# Altium PCB main.PcbDoc
Units mm, origin at the board's own origin, x right, y up, seen from the top; angles counter-clockwise.
Board outline 68 x 61 mm, 2 copper layers (Top Layer, Bottom Layer); 12 components, 13 nets, 38 pads, 0 vias.
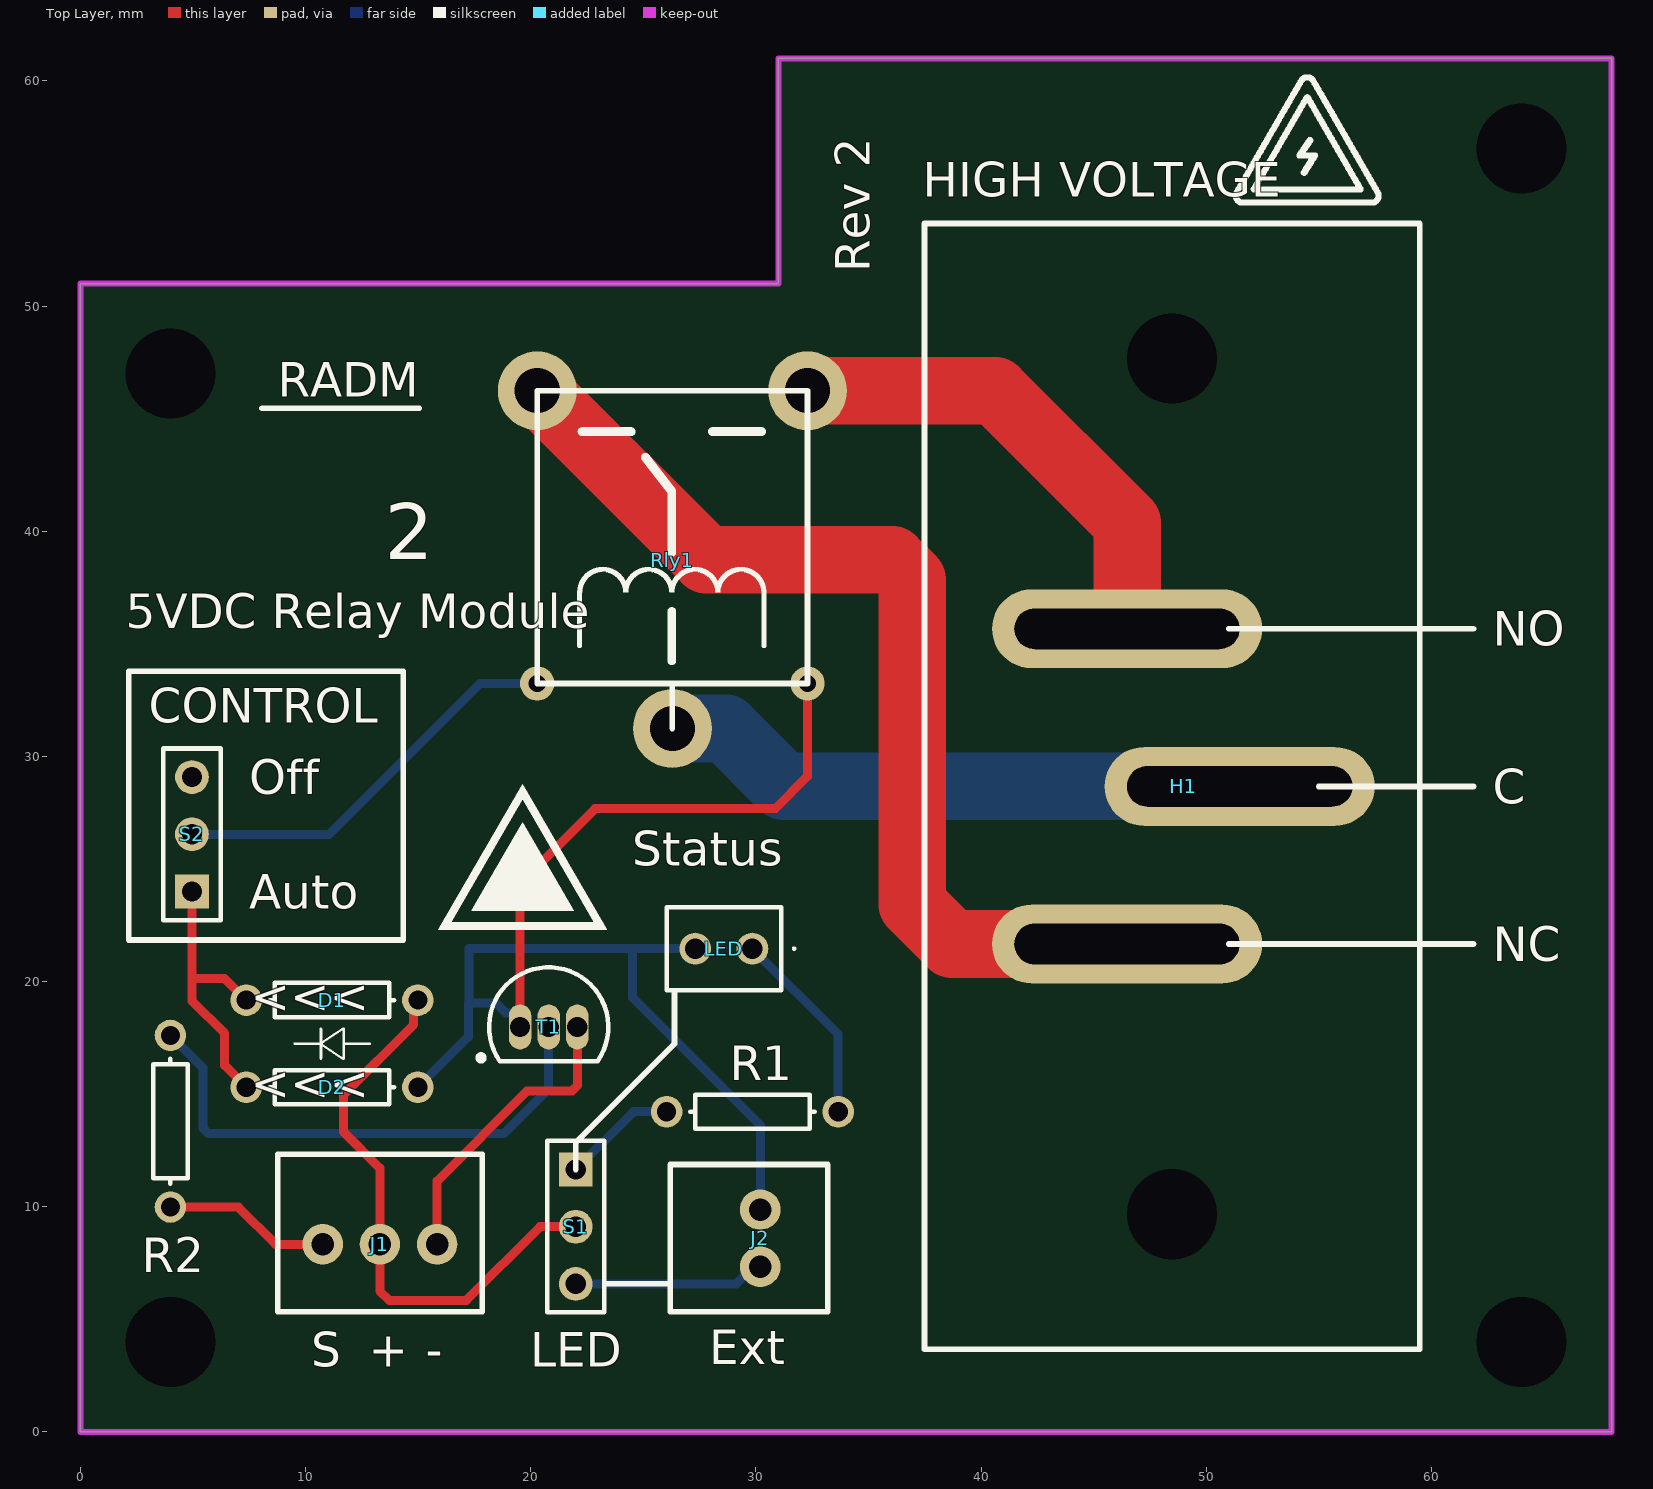
[diagram p0: Top Layer view]
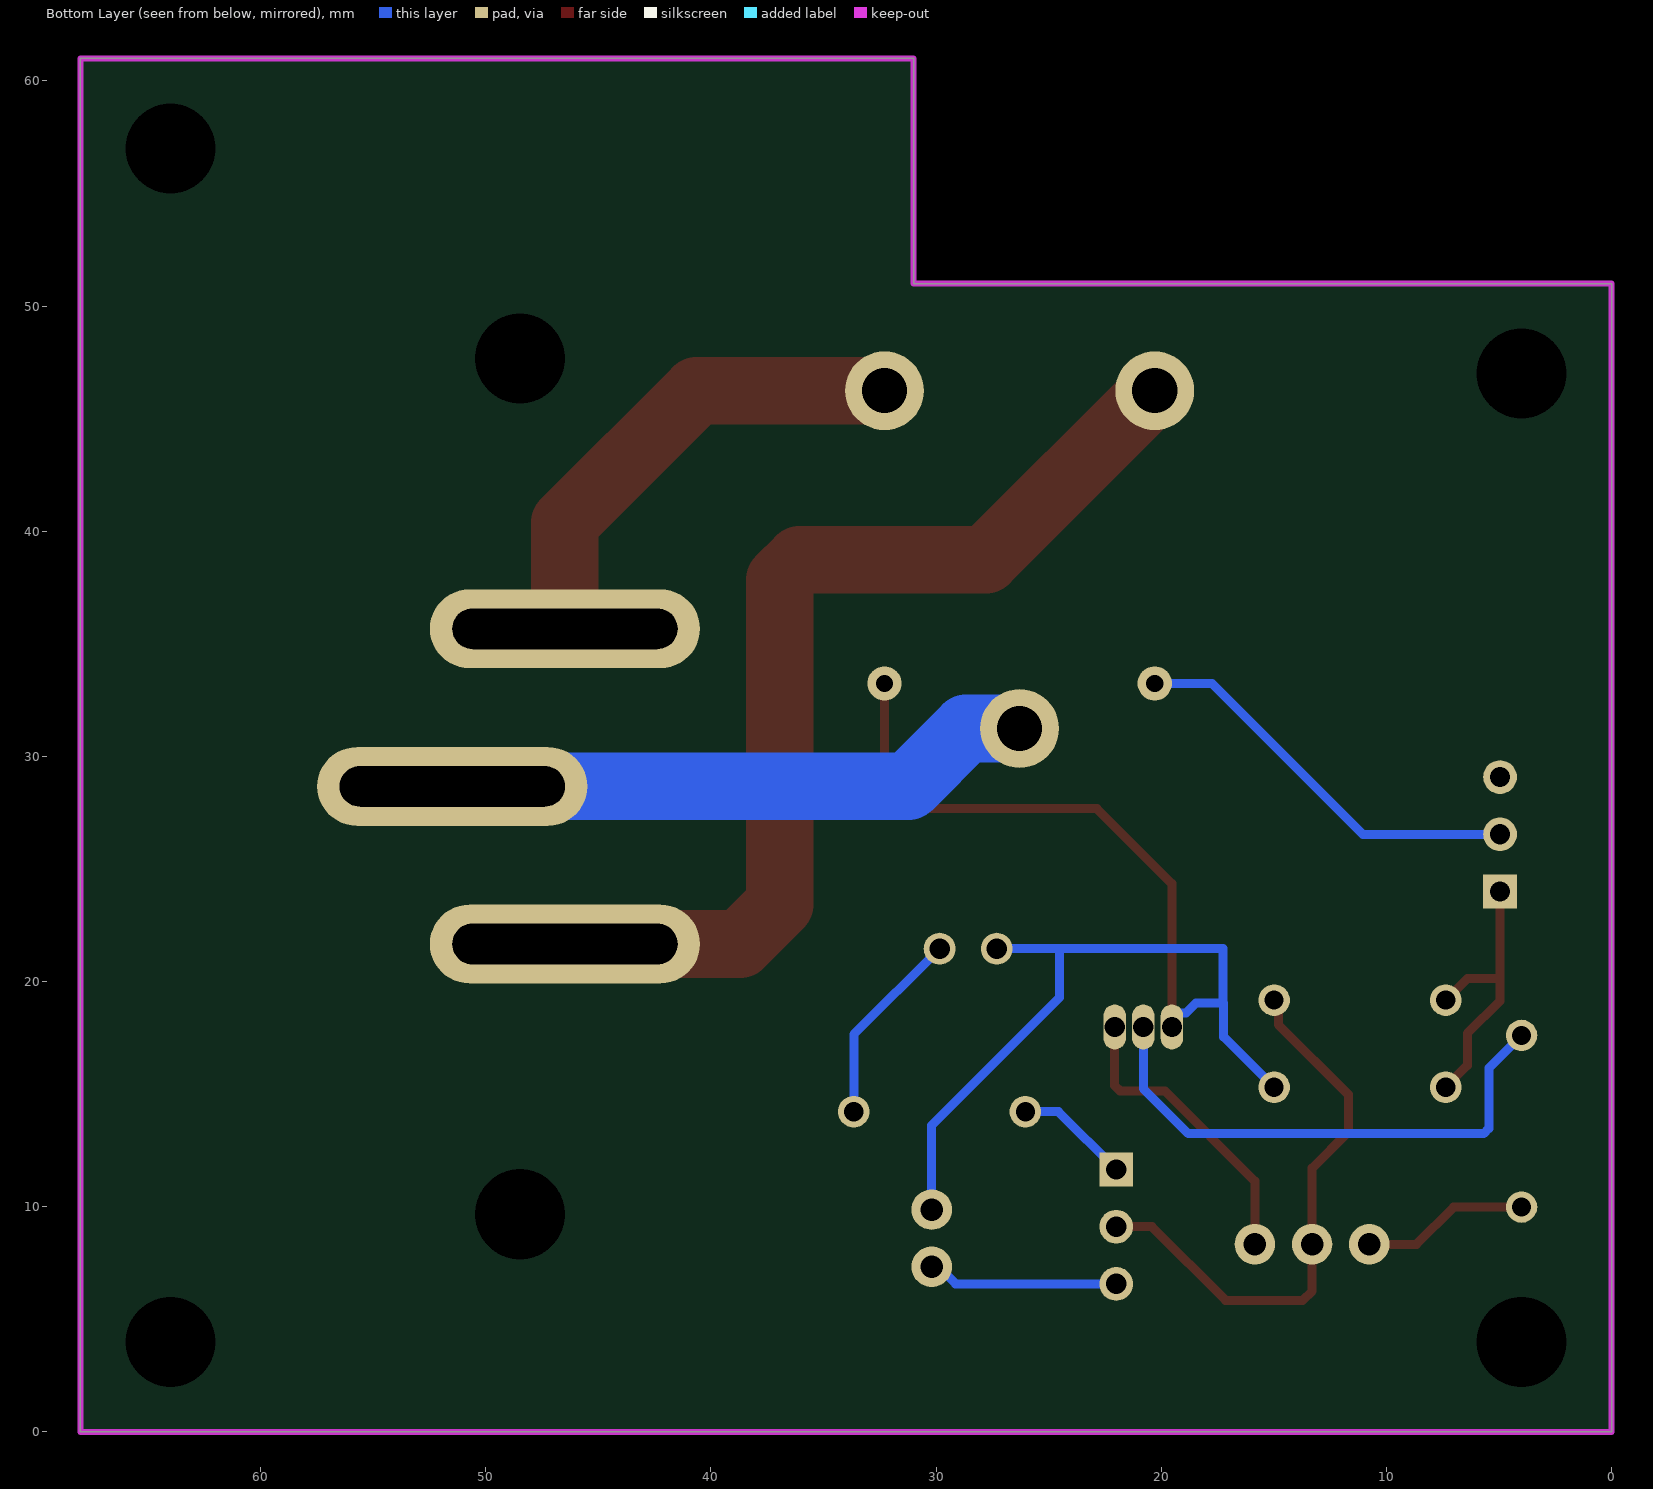
[diagram p1: Bottom Layer view, seen from below]

## Layer stack, top to bottom
Top Solder: solder mask 0.0102, Solder Resist, Dk 3.5
Top Layer: signal copper 0.0356
Dielectric 1: dielectric 0.32, FR-4, Dk 4.8
Bottom Layer: signal copper 0.0356
Bottom Solder: solder mask 0.0102, Solder Resist, Dk 3.5

## Board outline
0,0 68,0 68,61 31,61 31,51 0,51

## Design rules (kind name [scope] priority, off if disabled: settings)
Clearance [All] p1: gap=0.254 ignorepadtopadclearanceinfootprint=FALSE except(0: Arc-Hole Track-Hole SMDPad-Hole THPad-Hole Via-Hole Fill-Hole Poly-Hole Region-Hole Text-Hole)
Height [All] p1: minheight=0 maxheight=40 prefheight=12.7
PolygonConnect [All] p1: connectstyle=Relief reliefconductorwidth=0.254 reliefentries=4 polygonreliefangle="90 Angle" airgapwidth=0.254
RoutingVias [All] p1: holewidth=0.711 width=1.27 viastyle="Through Hole" minholewidth=0.711 minwidth=1.27 maxholewidth=0.711 maxwidth=1.27
SolderMaskExpansion [All] p1: expansion=0.102 istentingtop=FALSE
Width [All] p1: maxlimit=3 minlimit=0.4 preferedwidth=0.4
29 further rules are at their usual default settings.

## Components (designator, comment, footprint, x,y, rotation, side; value= is the part's Value field where it differs from the comment)
D1 "Diode" AXIAL-0.3 11.176,19.177 r0 top value=0
D2 "Diode" AXIAL-0.3 11.176,15.312 r180 top value=0
H1 "1 Pin HV Connector" "C13 Female Plug" 48.482,28.67 r90 top
J1 "JST 2.54mm 3 Pin" "JST 2.54mm 3 pin" 10.763,8.334 r0 top
J2 "Component_1" "JST 2 pin 2.54mm" 30.194,7.334 r90 top
LED "" C5SMFRJECT0W0BB2 29.845,21.463 r180 top
R1 "Res1" AXIAL-0.3 29.845,14.224 r180 top value=220
R2 "Res1" AXIAL-0.3 4,13.8 r270 top locked value=1K
Rly1 "5VDC Relay" "SRD-05VDC Relay" 32.289,46.242 r180 top
S1 "Header 3" HDR1X3 22,11.657 r270 top
S2 "Override Switch" HDR1X3 4.953,24.003 r90 top
T1 "NPN" TO-226-AA 20.796,17.986 r270 top

## Footprints (in the part's own frame and the unit in brackets; to place one, negate y for a bottom-side part, rotate by r counter-clockwise, add the part's x,y. Pads: shape width x height; smd on the part's side, far side on the other; paste and mask are expansions set on the pad)
AXIAL-0.3 [mm] "Axial Device, Thru-Hole; 2 Leads; 0.3 in Pin Spacing"
  round 1.4 hole 0.85: 1(-3.81,0) 2(3.81,0)
  silkscreen extent -2.77,-0.76 2.77,0.76
C5SMFRJECT0W0BB2 [mm]
  round 1.416 hole 0.91: 1(0,0) 2(2.54,0)
  silkscreen extent -1.9,-1.85 3.81,1.85, body extent -1.28,-1.85 3.82,1.85, height 8.85
"C13 Female Plug" [mm]
  oval 3.5x12 hole 1.8 slot 10 at 90 deg: 1(-7,2) 2(0,-3) 3(7,2)
  round 1.524 hole 4 unplated: 4(-19,0) 5(19,0)
  silkscreen extent -25,-11 25,11
HDR1X3 [mm] "Connector; Header; 3 Position"
  rect 1.5x1.5 hole 0.9: 1(0,0)
  round 1.5 hole 0.9: 2(2.54,0) 3(5.08,0)
  silkscreen extent -1.27,-1.27 6.35,1.27
"JST 2 pin 2.54mm" [mm]
  round 1.8 hole 1: 1(0,0) 2(2.54,0)
  silkscreen extent -2,-3 4.54,4
"JST 2.54mm 3 pin" [mm]
  round 1.8 hole 1: 1(0,0) 2(2.54,0) 3(5.08,0)
  silkscreen extent -2,-3 7.08,4
"SRD-05VDC Relay" [mm]
  round 3.5 hole 2: 1(0,0) 2(12,0) 5(6,15)
  round 1.524 hole 0.762: 3(12,13) 4(0,13)
  silkscreen extent 0,0 12,15
TO-226-AA [mm] "TO, Flat Index; 3 In-Line, Axial Leads; Body Dia. 4.8mm; Leads 0.55 x 0.51 mm (max)"
  oval 2x1 hole 0.9: 1(0,-1.27) 2(0,0) 3(0,1.27)
  silkscreen extent -2.65,-3.13 1.52,2.65, body extent -2.65,-2.66 1.52,2.66, height 5.33

## Part data
D1 D2: library part Res1, "Resistor", LatestRevisionDate=17-Jul-2002, LatestRevisionNote="Re-released for DXP Platform.", PackageDescription="Axial Device, Thru-Hole; 2 Leads; 0.3 in Pin Spacing", PackageReference=AXIAL-0.3, Published=8-Jun-2000, Publisher="Altium Limited"
H1: "Through-hole pad for soldering a high voltage wire"
LED: library part C5SMF-RJE-CT0W0BB2, "LED", Manufacturer_Name=Wolfspeed, Mouser Part Number=941-C5SMFRJECT0W0BB2, Arrow Part Number=C5SMF-RJE-CT0W0BB2, Arrow Price/Stock=https://www.arrow.com/en/products/c5smf-rje-ct0w0bb2/cree-led?region=nac, Datasheet Link=https://www.mouser.com/datasheet/2/723/C5SMF_RJF_RJE_GJF_GJE_BJF_BJE_1240-2256911.pdf, Height=8.75mm, Manufacturer_Part_Number=C5SMF-RJE-CT0W0BB2, Mouser Price/Stock=https://www.mouser.co.uk/ProductDetail/Cree-LED/C5SMF-RJE-CT0W0BB2?qs=1sbE9T7hb3bz%2FXMFB8lsHw%3D%3D
R1 R2: "Resistor", LatestRevisionDate=17-Jul-2002, LatestRevisionNote="Re-released for DXP Platform.", PackageDescription="Axial Device, Thru-Hole; 2 Leads; 0.3 in Pin Spacing", PackageReference=AXIAL-0.3, Published=8-Jun-2000, Publisher="Altium Limited"
Rly1: "https://www.amazon.com/MiZOELEC-SRD-05VDC-SL-C-Household-Appliance-Arduino/dp/B09J23B9WJ/ref=sr_1_1_sspa?keywords=srd-05vdc-sl-c&qid=1693356713&sr=8-1-spons&sp_csd=d2lkZ2V0TmFtZT1zcF9hdGY&psc=1"
S1: "Header, 3-Pin", LatestRevisionDate=17-Jul-2002, LatestRevisionNote="Re-released for DXP Platform.", Publisher="Altium Limited"
S2: library part "Header 3", "Header, 3-Pin", LatestRevisionDate=17-Jul-2002, LatestRevisionNote="Re-released for DXP Platform.", Publisher="Altium Limited"
T1: "NPN Bipolar Transistor", Code_JEDEC=TO-226-AA, LatestRevisionDate=17-Jul-2002, LatestRevisionNote="Re-released for DXP Platform.", PackageDescription="TO, Flat Index; 3 In-Line, Axial Leads; Body Dia. 4.8mm; Leads 0.55 x 0.51 mm (max)", PackageReference=TO-226-AA, Published=8-Jun-2000, Publisher="Altium Limited"

## Free pads (board coordinates)
  round 1.524 hole 4: 91(4,4) 92(64,4) 93(64,57) 94(4,47)

## Nets (pads, with @x,y where several pads share a name; then routed paths per layer and width w, separated by ;. In a path a pad name is that pad's centre, name@x,y a point inside that pad or via, vN(x,y) a via of type N, cw(c..) or ccw(c..) an arc to the next point about the centre after c; other vN are vias at no path point)
+5V: D1.2 J1.2 S1.2 | length 25.2
  Top Layer w0.4: D1.2 14.795,18.986 14.795,18.095 11.684,14.984 11.684,13.335 13.303,11.716 J1.2 13.303,6.255 13.716,5.842 17.145,5.842 20.42,9.117 S1.2
"Coil 1": D1.1 D2.2 S2.1 | length 12.5
  Top Layer w0.4: S2.1 4.953,20.147 ; D2.2 6.4,16.278 6.4,17.7 4.953,19.147 4.953,20.147 ; D1.1 6.396,20.147 4.953,20.147
"Coil 2": D2.1 J2.2 LED.2 Rly1.4 T1.1 | length 59.3
  Top Layer w0.4: T1.1 19.526,24.352 22.86,27.686 30.861,27.686 32.289,29.114 Rly1.4
  Bottom Layer w0.4: D2.1 17.224,17.55 17.224,19.05 ; T1.1 19.526,18.324 19.249,18.601 18.911,18.601 18.462,19.05 17.224,19.05 ; LED.2 24.511,21.463 ; J2.2 30.194,13.621 24.511,19.304 24.511,21.463 ; 17.224,19.05 17.25,19.076 17.25,21.463 24.511,21.463
Common: H1.2 Rly1.5 | length 26.3
  Bottom Layer w3: Rly1.5 28.658,31.242 31.23,28.67 H1.2
"External LED": J2.1 S1.3 | length 8.5
  Bottom Layer w0.4: S1.3 29.133,6.577 29.89,7.334 J2.1
GND: J1.3 T1.3 | length 13.4
  Top Layer w0.4: J1.3 15.843,11.144 19.844,15.145 21.832,15.145 22.066,15.379 T1.3
"Internal LED": R1.2 S1.1 | length 5.1
  Bottom Layer w0.4: S1.1 24.567,14.224 R1.2
NC: H1.1 Rly1.2 | length 44.8
  Top Layer w3: Rly1.2 27.796,38.735 36.05,38.735 36.95,37.835 36.95,23.427 38.707,21.67 H1.1
NetLED_1: LED.1 R1.1 | length 8.8
  Bottom Layer w0.4: LED.1 33.655,17.653 R1.1
NetR2_1: R2.1 T1.2 | length 23.7
  Bottom Layer w0.4: R2.1 5.45,16.16 5.45,13.484 5.684,13.25 18.8,13.25 20.796,15.246 T1.2
NetRly1_3: Rly1.3 S2.2 | length 18.1
  Bottom Layer w0.4: S2.2 11.049,26.543 17.748,33.242 Rly1.3
NO: H1.3 Rly1.1 | length 21.3
  Top Layer w3: Rly1.1 40.626,46.242 46.482,40.386 H1.3
Signal: J1.1 R2.2 | length 7.4
  Top Layer w0.4: R2.2 7.01,9.99 8.666,8.334 J1.1
pads on no net: H1.4 H1.5 S2.3

## Polygon pours and split planes (outlines as drawn)
no net on Top Layer "NONET_L01_P000" (hatched 45Degree grid 0.508 track 0.203, shelved, pour order 0): 0,0 68,0 68,61 31,61 31,51 0,51
GND on Bottom Layer "NONET_L02_P001" (hatched 45Degree grid 0.508 track 0.203, shelved, pour order 1): 0,0 68,0 68,61 31,61 31,51 0,51

## Keep-outs
Keep-Out Layer:
  the board outline again, w0.254

## Other copper
Top Layer:
  pour cut-out: 17.45,49 42.95,49 57.35,34.6 57.35,23.9 50.15,16.7 38.9,16.7 34.1,21.5 34.1,25.3 33.9,25.5 33.9,25.55 26.15,25.55 23.7,28 23.7,37.65 17.45,43.9
Bottom Layer:
  pour cut-out: 17.45,49 42.95,49 57.35,34.6 57.35,23.9 50.15,16.7 38.9,16.7 34.1,21.5 34.1,25.3 33.9,25.5 33.9,25.55 26.15,25.55 23.7,28 23.7,37.65 17.45,43.9

## Silkscreen, mask and mechanical layers (free items; w line width, h text height)
Top Overlay:
  drawing of 20 lines, arcs and shapes, not listed
  text "HIGH VOLTAGE" at 37.401,54.864 h1.52
  text "Rev 2" at 35.046,51.495 h1.52 r90
  text "RADM" at 8.764,45.974 h1.52
  text "2" at 13.506,38.755 h2.5
  text "5VDC Relay Module" at 2.02,35.687 h1.52
  text "NO" at 62.73,34.908 h1.52
  text "CONTROL" at 3.036,31.496 h1.52
  text "Off" at 7.493,28.321 h1.52
  text "C" at 62.73,27.908 h1.52
  text "Status" at 24.512,25.146 h1.52
  text "Auto" at 7.493,23.241 h1.52
  text "NC" at 62.73,20.908 h1.52
  text ">>>" at 12.826,19.939 h1.52 r180
  text ">>>" at 12.826,16.073 h1.52 r180
  text "Ext" at 27.917,3.016 h1.52
  text "S" at 10.255,2.889 h1.52
  text "+" at 12.795,2.889 h1.52
  text "-" at 15.335,2.889 h1.52
  text "LED" at 19.969,2.889 h1.52